# Altium PCB Driver.PcbDoc
Units mm, origin at the board's own origin, x right, y up, seen from the top; angles counter-clockwise.
Board outline 96 x 96 mm, 2 copper layers (Top Layer, Bottom Layer); 70 components, 57 nets, 224 pads, 32 vias.
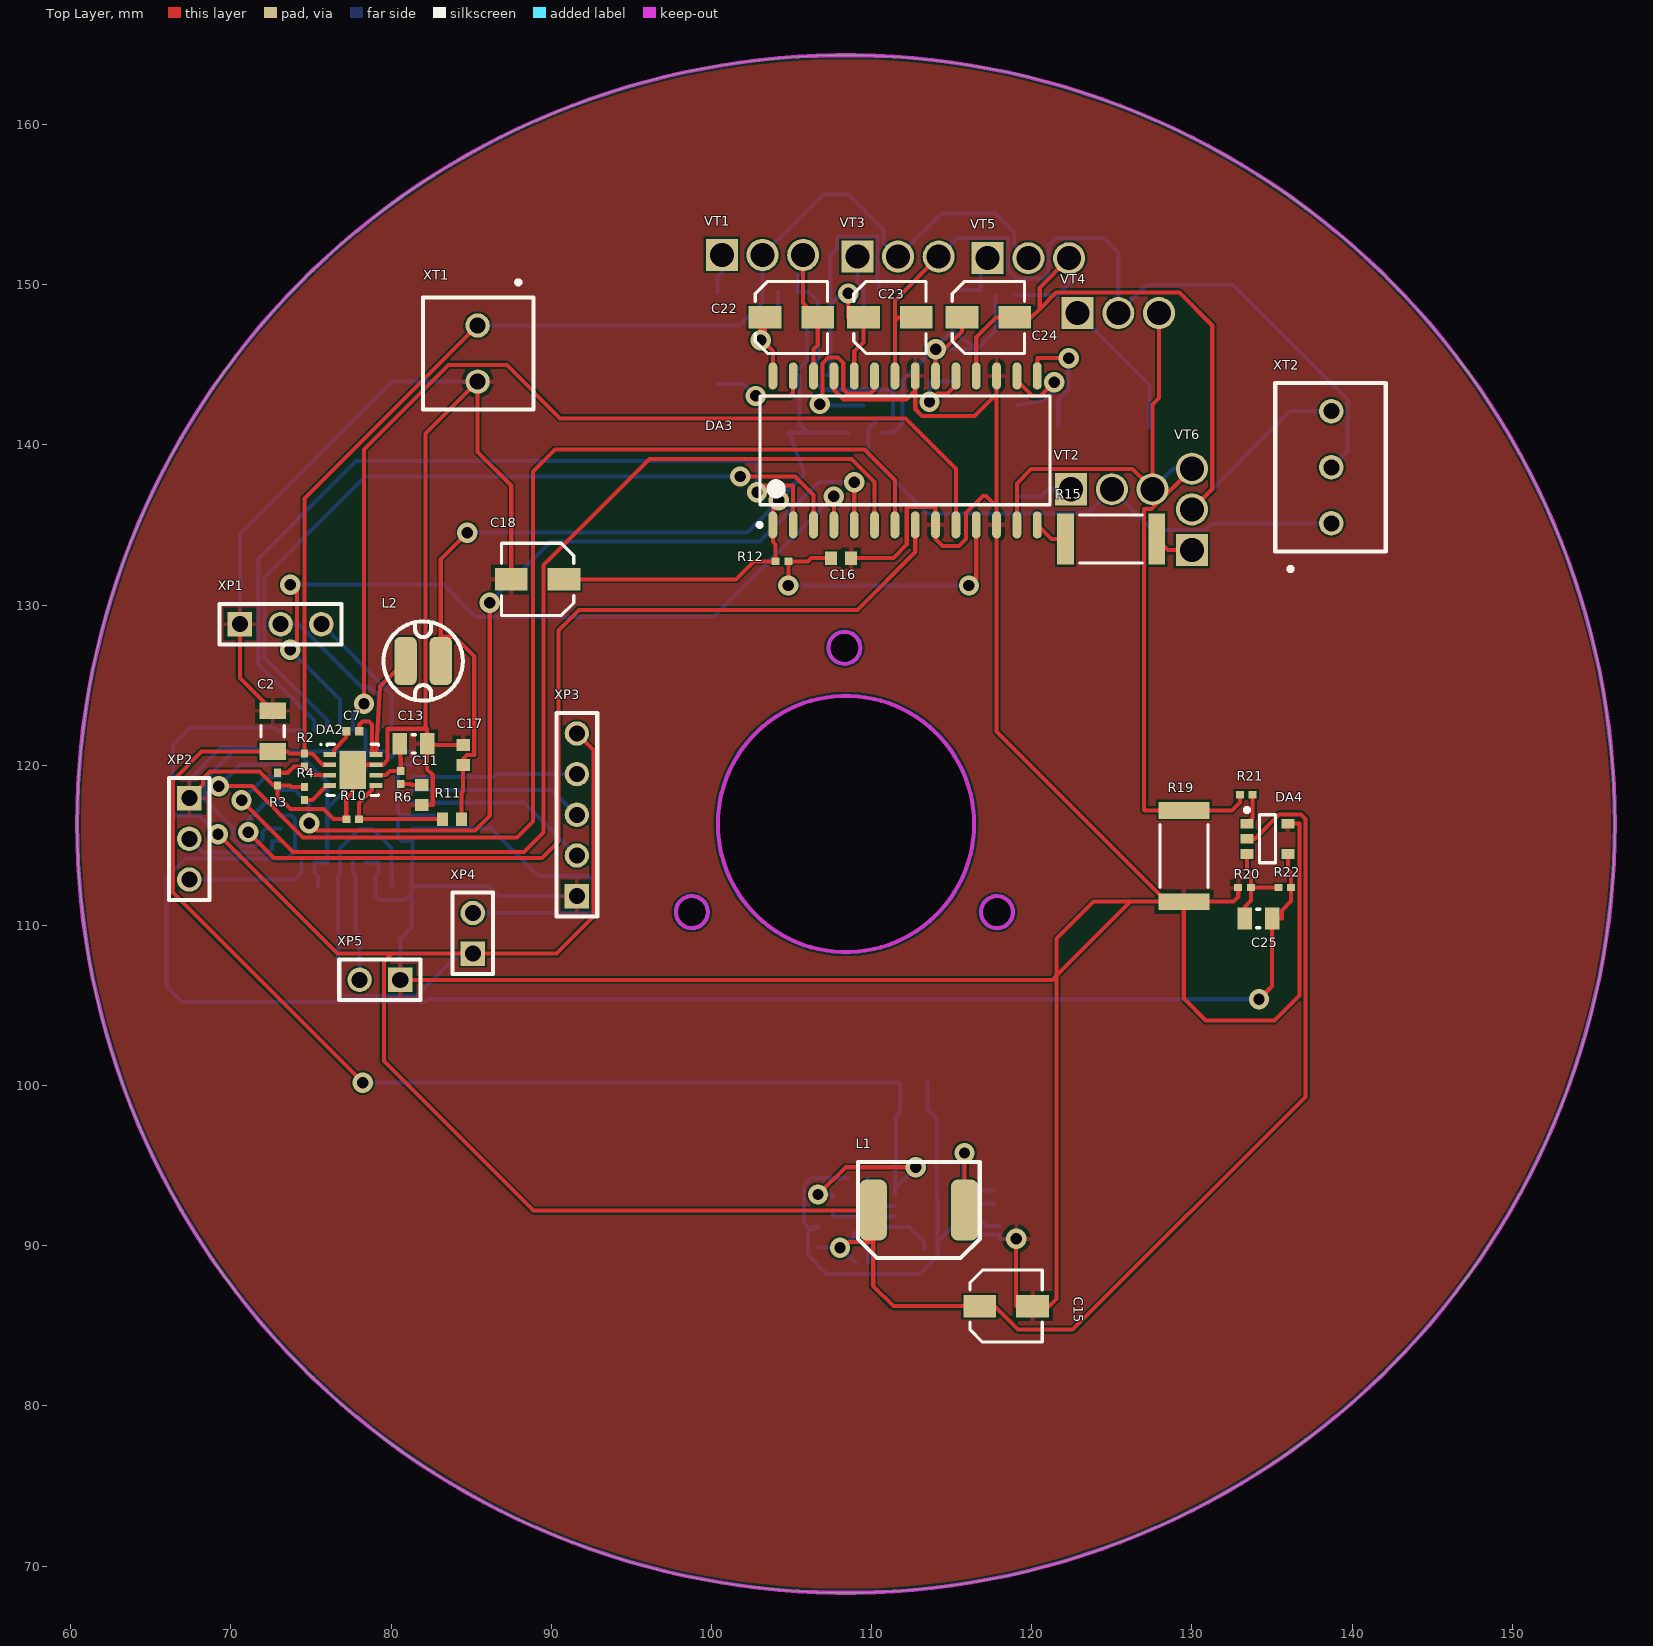
[diagram p0: Top Layer view]
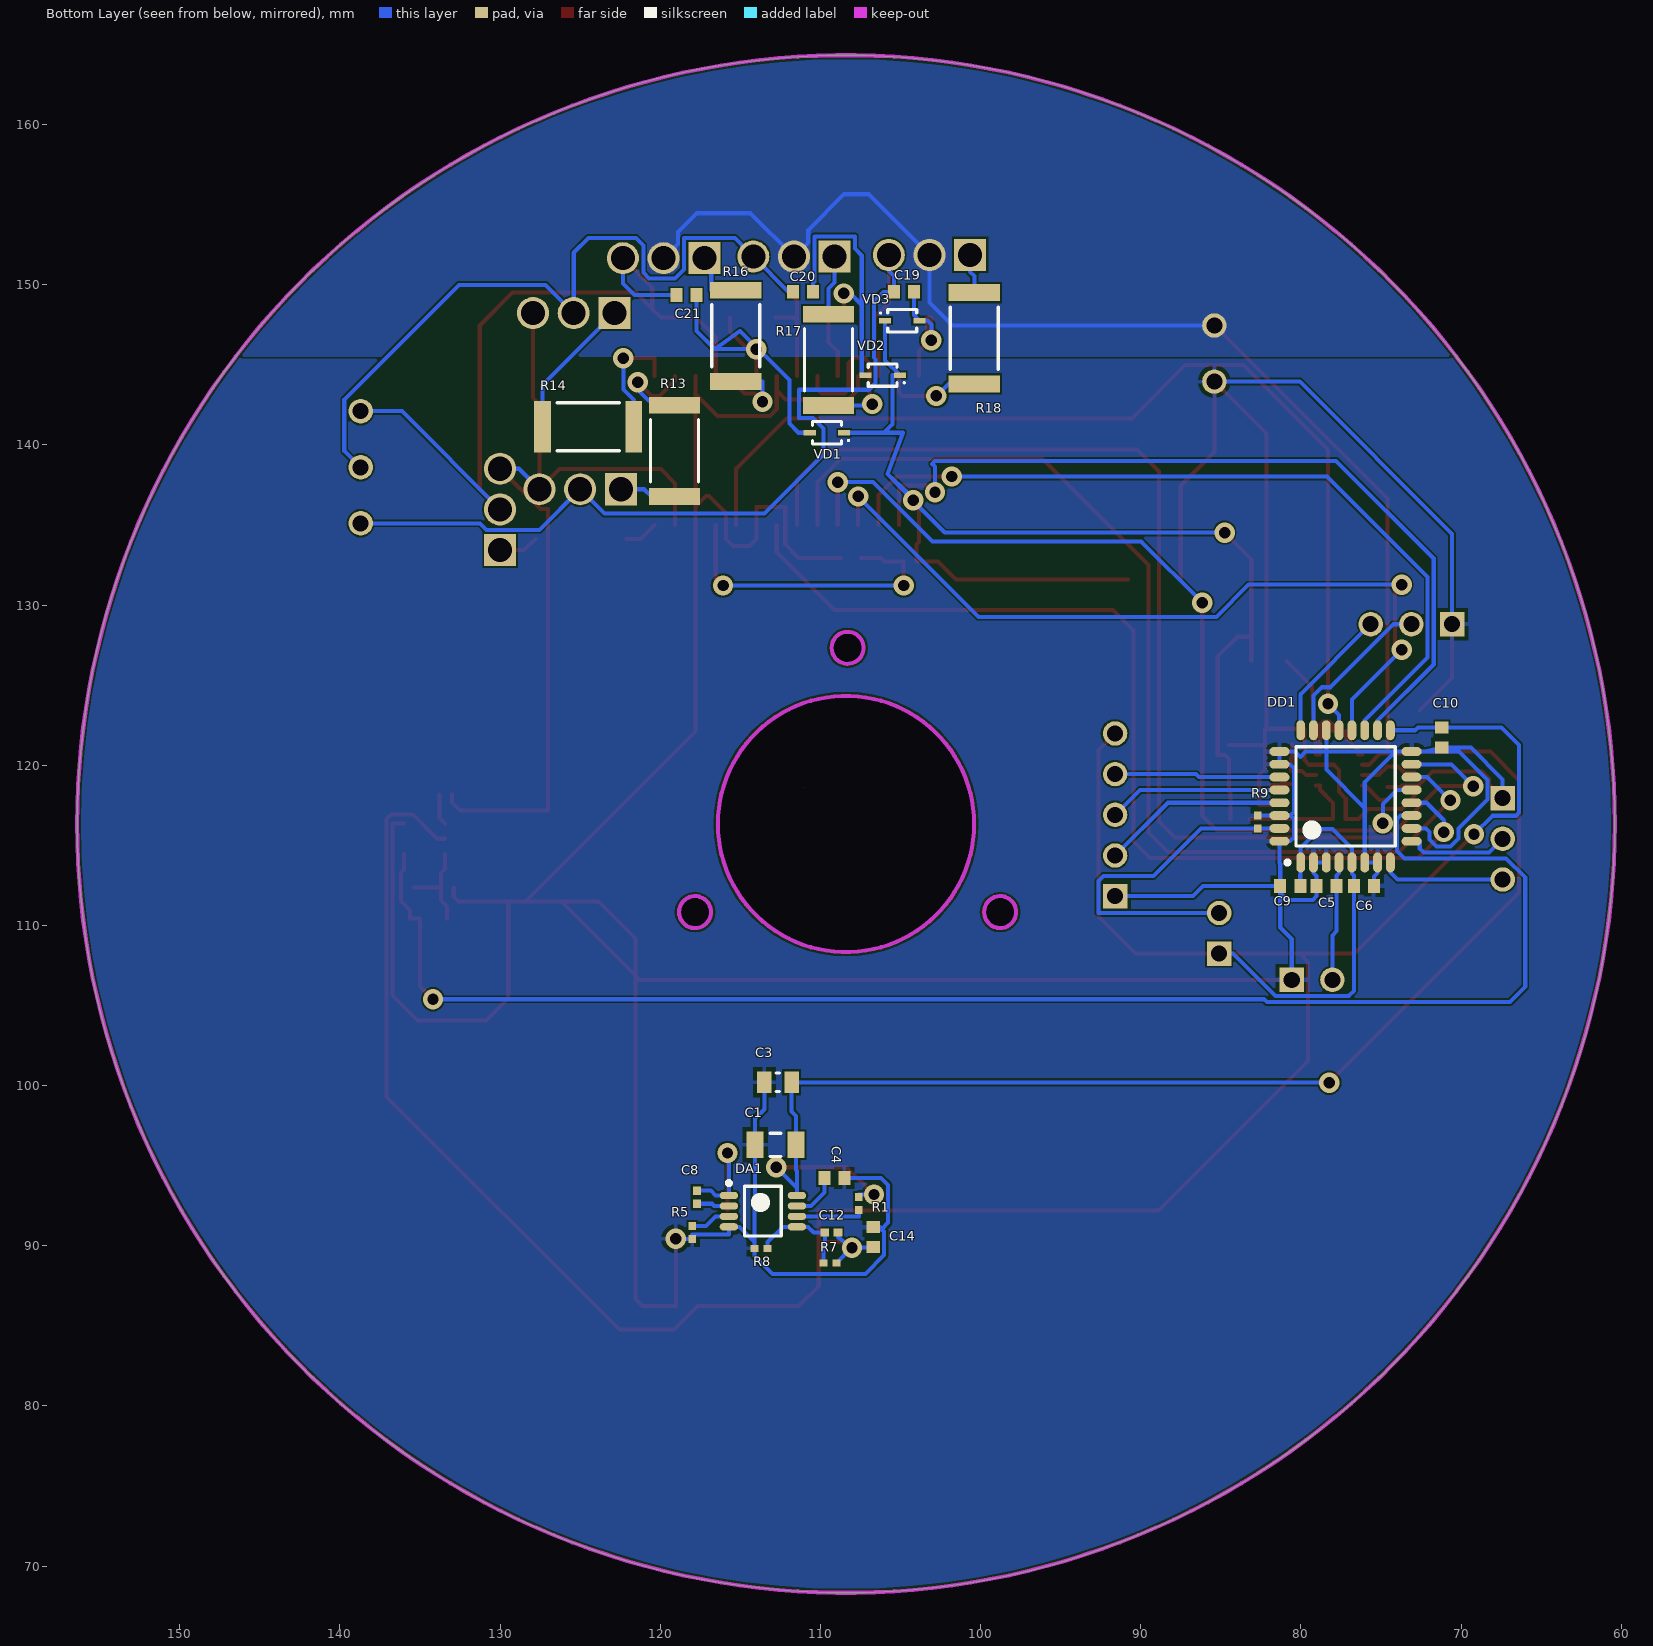
[diagram p1: Bottom Layer view, seen from below]
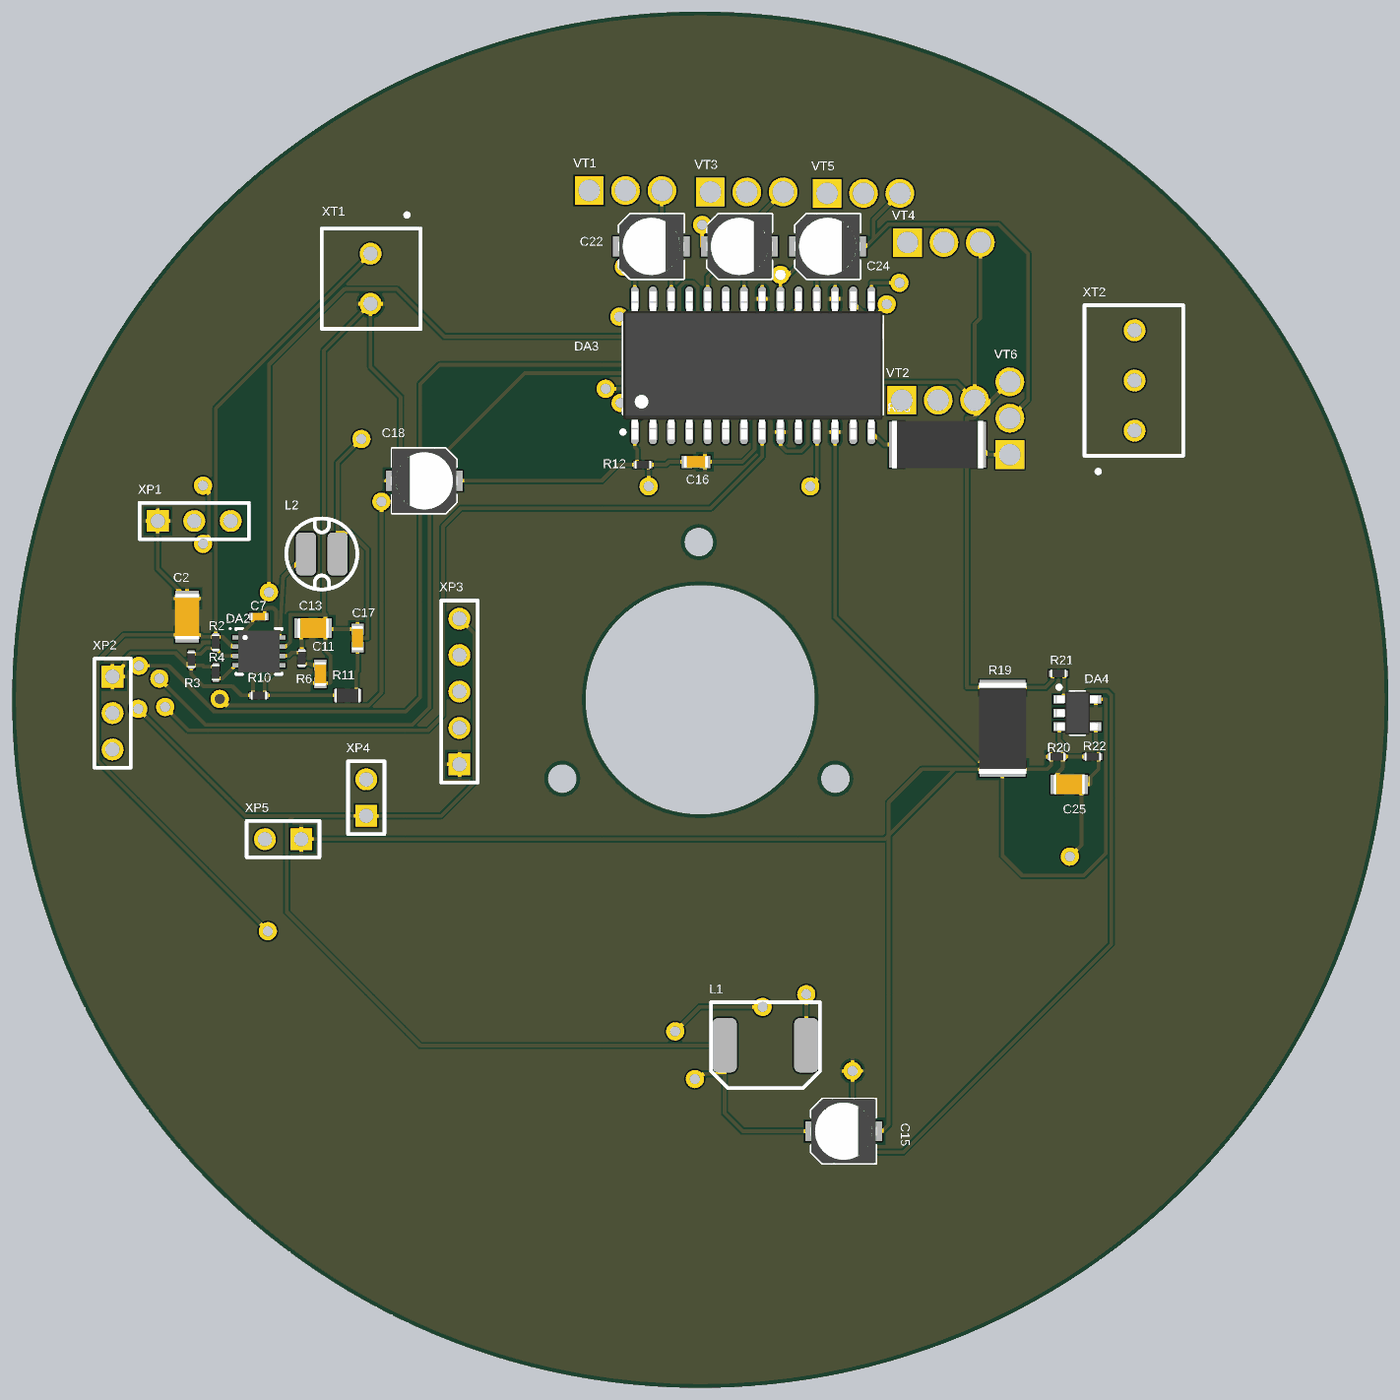
[diagram p2: 3D render of the assembled board from above, using the file's embedded part models]
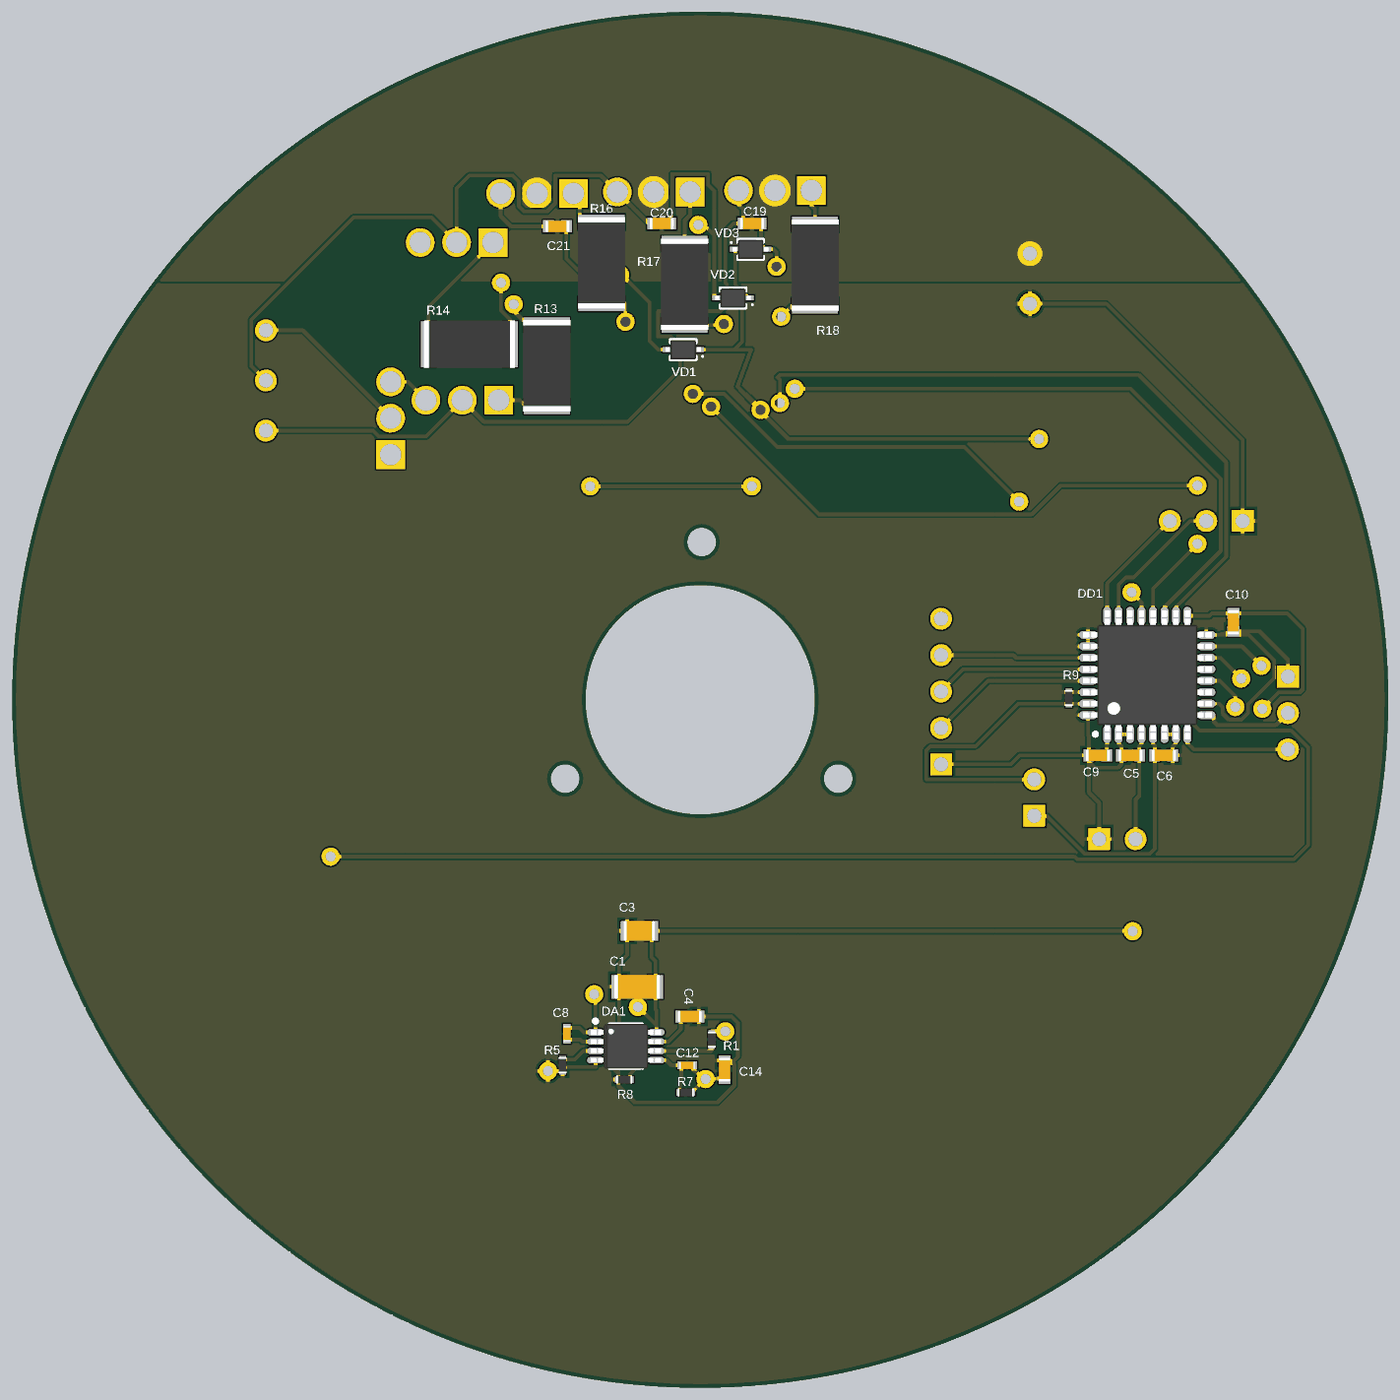
[diagram p3: 3D render of the assembled board from below, using the file's embedded part models]

## Layer stack, top to bottom
Top Solder: solder mask 0.0102, Solder Resist, Dk 3.5
Top Layer: signal copper 0.0356
Dielectric 1: dielectric 0.32, FR-4, Dk 4.8
Bottom Layer: signal copper 0.0356
Bottom Solder: solder mask 0.0102, Solder Resist, Dk 3.5

## Board outline
108.4,68.327 cw(c108.4,116.327) 60.4,116.327 cw(c108.4,116.327) 108.4,164.327 cw(c108.4,116.327) 156.4,116.327 cw(c108.4,116.327)
cut-out: 111,118.627
cut-out: 108.4,108.327 cw(c108.4,116.327) 100.4,116.327 cw(c108.4,116.327) 108.4,124.327 cw(c108.4,116.327) 116.4,116.327 cw(c108.4,116.327)
cut-out: 108.3,126.327 cw(c108.3,127.327) 107.3,127.327 cw(c108.3,127.327) 108.3,128.327 cw(c108.3,127.327) 109.3,127.327 cw(c108.3,127.327)
cut-out: 98.774,109.827 cw(c98.774,110.827) 97.774,110.827 cw(c98.774,110.827) 98.774,111.827 cw(c98.774,110.827) 99.774,110.827 cw(c98.774,110.827)
cut-out: 116.826,110.827 ccw(c117.826,110.827) 117.826,109.827 ccw(c117.826,110.827) 118.826,110.827 ccw(c117.826,110.827) 117.826,111.827 ccw(c117.826,110.827)

## Design rules (kind name [scope] priority, off if disabled: settings)
Clearance Clearance_1 [All] p1: gap=0.125 ignorepadtopadclearanceinfootprint=TRUE
Clearance [All] p2: gap=0.125 ignorepadtopadclearanceinfootprint=TRUE
PolygonConnect PolygonConnect_1 [InNet('+36V')] p1: connectstyle=Direct reliefconductorwidth=0.254 reliefentries=4 polygonreliefangle="90 Angle" airgapwidth=0.254
PolygonConnect [All] p2: connectstyle=Relief reliefconductorwidth=0.254 reliefentries=4 polygonreliefangle="90 Angle" airgapwidth=0.254
RoutingVias [All] p1: holewidth=0.711 width=1.27 viastyle="Through Hole" minholewidth=0.711 minwidth=1.27 maxholewidth=0.711 maxwidth=1.27
SolderMaskExpansion [All] p1: expansion=0.102
Width [All] p1: maxlimit=0.254 minlimit=0.254 preferedwidth=0.254
30 further rules are at their usual default settings.

## Components (designator, comment, footprint, x,y, rotation, side; value= is the part's Value field where it differs from the comment)
DA1 "DC-DC36-3.3" VSSOP8 113.588,92.154 r180 bottom
DA2 "TPS54061DRBR" VSON8 77.612,119.7 r0 top
DA3 "IR21365S" SOIC28 112.088,139.654 r90 top
DA4 "LMV321ILT" SOT23-5 134.713,115.404 r0 top
DD1 "STM32F030K6T6TR" LQFP32 77.213,118.054 r90 bottom
L1 "IND6X6" IND6X6 112.95,92.227 r180 top
L2 "IND3" IND3 82,126.5 r0 top
R1 "RES0402" RES0402 107.6,92.627 r270 bottom
R2 "RES0402" RES0402 74.6,120.327 r270 top
R3 "RES0402" RES0402 72.9,119.127 r270 top
R4 "RES0402" RES0402 74.6,118.227 r90 top
R5 "RES0402" RES0402 118,90.827 r270 bottom
R6 "RES0402" RES0402 80.6,119.227 r270 top
R7 "RES0402" RES0402 109.4,88.927 r180 bottom
R8 "RES0402" RES0402 113.7,89.827 r0 bottom
R9 "RES0402" RES0402 82.688,116.454 r90 bottom
R10 "RES0402" RES0402 77.6,116.627 r180 top
R11 "RES0603" RES0603 83.8,116.627 r180 top
R12 "RES0402" RES0402 104.4,132.727 r0 top
R13 "RES2512" RES2512 119.1,139.627 r270 bottom
R14 "RES2512" RES2512 124.5,141.127 r0 bottom
R15 "RES2512" RES2512 124.95,134.127 r0 top
R16 "RES2512" RES2512 115.288,146.804 r90 bottom
R17 "RES2512" RES2512 109.488,145.304 r90 bottom
R18 "RES2512" RES2512 100.388,146.654 r90 bottom
R19 "RES2512" RES2512 129.5,114.327 r270 top
R20 "RES0402" RES0402 133.288,112.354 r0 top
R21 "RES0402" RES0402 133.388,118.154 r0 top
R22 "RES0402" RES0402 135.788,112.354 r0 top
VD1 "DIODE" SOD323 109.588,140.754 r0 bottom
VD2 "DIODE" SOD323 106.113,144.354 r0 bottom
VD3 "DIODE" SOD323 104.888,147.754 r180 bottom
VT1 "IRFZ24NPBF" TO-220 103.188,151.854 r0 top
VT2 "IRFZ24NPBF" TO-220 125,137.227 r0 top
VT3 "IRFZ24NPBF" TO-220 111.648,151.754 r0 top
VT4 "IRFZ24NPBF" TO-220 125.4,148.227 r0 top
VT5 "IRFZ24NPBF" TO-220 119.788,151.654 r0 top
VT6 "IRFZ24NPBF" TO-220 130,135.967 r90 top
XP1 "SWDIO_CONNECTOR" PLC-3 73.1,128.8 r180 top
XP2 "UART_CONNECTOR" PLC-3 67.4,115.4 r90 top
XP3 "HALL_CONNECTOR" PLC-5 91.6,116.9 r270 top
XP4 "BOOT0_CONNECTOR" PLC-2 85.1,109.5 r270 top
XP5 "RESET_CONNECTOR" PLC-2 79.3,106.6 r0 top
XT1 "POWER_CONNECTOR" 350-2 85.4,145.7 r270 top
XT2 "PHASE_CONNECTOR" 350-3 138.7,138.6 r90 top
С1 "CAP1206" CAP1206 112.8,96.3 r0 bottom
С2 "CAP1206" CAP1206 72.6,122.127 r90 top
С3 "CAP0805" CAP0805 112.65,100.2 r0 bottom
С4 "CAP0603" CAP0603 109.125,94.227 r180 bottom
С5 "CAP0603" CAP0603 78.388,112.454 r180 bottom
С6 "CAP0603" CAP0603 76.063,112.454 r0 bottom
С7 "CAP0402" CAP0402 77.6,122.127 r0 top
С8 "CAP0402" CAP0402 117.7,93.027 r90 bottom
С9 "CAP0603" CAP0603 80.663,112.454 r0 bottom
С10 "CAP0603" CAP0603 71.2,121.727 r90 bottom
С11 "CAP0603" CAP0603 81.9,118.127 r270 top
С12 "CAP0402" CAP0402 109.31,90.827 r180 bottom
С13 "CAP0805" CAP0805 81.4,121.327 r0 top
С14 "CAP0603" CAP0603 106.7,90.527 r90 bottom
С15 "CAPD4" CAPD4 118.4,86.227 r0 top
С16 "CAP0603" CAP0603 108.1,132.927 r180 top
С17 "CAP0603" CAP0603 84.5,120.627 r90 top
С18 "CAPD4" CAPD4 89.15,131.6 r180 top
С19 "CAP0603" CAP0603 104.788,149.554 r0 bottom
С20 "CAP0603" CAP0603 111.088,149.554 r0 bottom
С21 "CAP0603" CAP0603 118.363,149.354 r0 bottom
С22 "CAPD4" CAPD4 104.988,147.954 r0 top
С23 "CAPD4" CAPD4 111.138,147.954 r0 top
С24 "CAPD4" CAPD4 117.288,147.954 r0 top
С25 "CAP0805" CAP0805 134.15,110.427 r0 top

## Footprints (in the part's own frame and the unit in brackets; to place one, negate y for a bottom-side part, rotate by r counter-clockwise, add the part's x,y. Pads: shape width x height; smd on the part's side, far side on the other; paste and mask are expansions set on the pad)
350-2 [mil]
  round 60 hole 39.37: 1(-68.9,0) 2(68.9,0)
  silkscreen extent -180,-134 138,138
350-3 [mil]
  round 60 hole 39.37: 1(-137.79,0) 2(0,0) 3(137.8,0)
  silkscreen extent -255,-134 207,138
CAP0402 [mm] "Chip Capacitor, 2-Leads, Body 1,00x0,50mm, IPC High Density"
  rect 0.54x0.52 smd: 1(-0.41,0) 2(0.41,0)
  body extent -0.55,-0.27 0.55,0.28, height 0.4
CAP0603 [mm] "Chip Capacitor, 2-Leads, Body 1,60x0,80mm, IPC High Density"
  rect 0.75x0.85 smd: 1(-0.625,0) 2(0.625,0)
  body extent -0.85,-0.41 0.85,0.4, height 0.9
CAP0805 [mm] "Chip Capacitor, 2-Leads, Body 2,10x1,30mm, IPC High Density"
  rect 0.9x1.35 smd: 1(-0.85,0) 2(0.85,0)
  silkscreen extent -0.1,-0.58 0.1,0.57, body extent -1.1,-0.7 1.1,0.7, height 0.55
CAP1206 [mm]
  rect 1.05x1.65 smd: 1(-1.275,0) 2(1.275,0)
  silkscreen extent -0.35,-0.73 0.35,0.72, body extent -1.6,-0.85 1.6,0.85, height 0.6
CAPD4 [mm] "Aluminum Electrolytic Capacitor, Body 4,30x4,30x6,10mm, IPC High Density"
  rect 2.05x1.4 smd: +(-1.65,0) -(1.65,0)
  silkscreen extent -2.25,-2.25 2.25,2.25, body extent -2.3,-2.25 2.3,2.25, height 6.1
IND3 [mm]
  rrect50% 1.4x3 smd: 1(-1.1,0) 2(1.1,0)
  silkscreen extent -2.47,-2.47 2.48,2.47
IND6X6 [mm]
  rrect50% 1.7x3.8 smd: 1(-2.85,0) 2(2.85,0)
  silkscreen extent -3.8,-3 3.8,3
LQFP32 [mm] "TQFP, 32-Leads, Body 7,00x7,00mm, Pitch 0,80mm, IPC High Density"
  oval 1.25x0.55 smd: 1(-4.125,2.8) 2(-4.125,2) 3(-4.125,1.2) 4(-4.125,0.4) 5(-4.125,-0.4) 6(-4.125,-1.2) 7(-4.125,-2) 8(-4.125,-2.8) 17(4.125,-2.8) 18(4.125,-2) 19(4.125,-1.2) 20(4.125,-0.4) 21(4.125,0.4) 22(4.125,1.2) 23(4.125,2) 24(4.125,2.8)
  oval 0.55x1.25 smd: 9(-2.8,-4.125) 10(-2,-4.125) 11(-1.2,-4.125) 12(-0.4,-4.125) 13(0.4,-4.125) 14(1.2,-4.125) 15(2,-4.125) 16(2.8,-4.125) 25(2.8,4.125) 26(2,4.125) 27(1.2,4.125) 28(0.4,4.125) 29(-0.4,4.125) 30(-1.2,4.125) 31(-2,4.125) 32(-2.8,4.125)
  silkscreen extent -4.25,-3.1 3.1,3.75, body extent -4.5,-4.5 4.5,4.5, height 1.6
PLC-2 [mil]
  round 60 hole 39.37: 1(-50,0)
  rect 60x60 hole 39.37: 2(50,0)
  silkscreen extent -100,-50 100,50
PLC-3 [mil]
  round 60 hole 39.37: 1(-100,0) 2(0,0)
  rect 60x60 hole 39.37: 3(100,0)
  silkscreen extent -150,-50 150,50
PLC-5 [mil]
  round 60 hole 39.37: 1(-200,0) 2(-100,0) 3(0,0) 4(100,0)
  rect 60x60 hole 39.37: 5(200,0)
  silkscreen extent -250,-50 250,50
RES0402 [mm]
  rect 0.5x0.45 smd: 1(-0.4,0) 2(0.4,0)
  body extent -0.55,-0.28 0.55,0.27, height 0.4
RES0603 [mm]
  rect 0.7x0.85 smd: 1(-0.6,0) 2(0.6,0)
  body extent -0.85,-0.48 0.85,0.48, height 0.5
RES2512 [mm]
  rect 1.05x3.2 smd: 1(-2.85,0) 2(2.85,0)
  silkscreen extent -1.95,-1.5 1.95,1.5, body extent -3.18,-1.65 3.18,1.65, height 0.6
SOD323 [mm]
  rect 0.75x0.35 smd: 1(-1.075,0) 2(1.075,0)
  silkscreen extent -1.4,-0.7 0.9,0.7, body extent -1.25,-0.67 1.25,0.68, height 1.1
SOIC28 [mm] "SOIC, 28-Leads, Body 17,90x7,50mm, Pitch 1,27mm, IPC High Density"
  oval 1.7x0.55 smd: 1(-4.65,8.255) 2(-4.65,6.985) 3(-4.65,5.715) 4(-4.65,4.445) 5(-4.65,3.175) 6(-4.65,1.905) 7(-4.65,0.635) 8(-4.65,-0.635) 9(-4.65,-1.905) 10(-4.65,-3.175) 11(-4.65,-4.445) 12(-4.65,-5.715) 13(-4.65,-6.985) 14(-4.65,-8.255) 15(4.65,-8.255) 16(4.65,-6.985) 17(4.65,-5.715) 18(4.65,-4.445) 19(4.65,-3.175) 20(4.65,-1.905) 21(4.65,-0.635) 22(4.65,0.635) 23(4.65,1.905) 24(4.65,3.175) 25(4.65,4.445) 26(4.65,5.715) 27(4.65,6.985) 28(4.65,8.255)
  silkscreen extent -4.77,-9.05 3.4,9.2, body extent -5.16,-9.05 5.16,9.05, height 2.65
SOT23-5 [mm] "SOT23, 5-Leads, Body 2,90x2,80mm, Pitch 0,95mm, IPC High Density"
  rect 0.8x0.6 smd: 1(-1.275,0.95) 2(-1.275,0) 3(-1.275,-0.95) 4(1.275,-0.95) 5(1.275,0.95)
  silkscreen extent -1.4,-1.5 0.5,1.92, body extent -1.6,-1.5 1.6,1.5, height 1.45
TO-220 [mm]
  round 2 hole 1.5: D(0,0) S(2.54,0)
  rect 2x2 hole 1.5: G(-2.54,0)
VSON8 [mm] "SON, 8-Leads, Body 3,00x3,00mm, Pitch 0,65mm, Thermal Pad 2,40x1,65mm, IPC High Density"
  rect 0.8x0.3 smd: 1(-1.445,0.975) 2(-1.445,0.325) 3(-1.445,-0.325) 4(-1.445,-0.975) 5(1.445,-0.975) 6(1.445,-0.325) 7(1.445,0.325) 8(1.445,0.975)
  rect 1.65x2.4 smd: 9(0,0)
  silkscreen extent -2.05,-1.6 1.6,1.65, body extent -1.45,-1.45 1.45,1.45, height 1
VSSOP8 [mm] "TSOP, 8-Leads, Body 3,00x3,00mm, Pitch 0,65mm, IPC High Density"
  oval 1.15x0.45 smd: 1(-2.125,0.975) 2(-2.125,0.325) 3(-2.125,-0.325) 4(-2.125,-0.975) 5(2.125,-0.975) 6(2.125,-0.325) 7(2.125,0.325) 8(2.125,0.975)
  silkscreen extent -2.25,-1.55 1.15,1.87, body extent -2.45,-1.55 2.45,1.55, height 1.1

## Part data
DA1: "LM5008MM/NOPB"
DA2: library part DC-DC36-12
DA3: library part DRIVER
DA4: library part OPAMP
DD1: library part MCU
R1 R4 R12: Resistance="97.6 к"
R2: Resistance="1.3 М"
R3 R9: Resistance="41.2 к"
R5: Resistance="107 к"
R6: Resistance="130 к"
R7 R10: Resistance="10 к"
R8: Resistance="31.6 к"
R11: Resistance="140 к"
R13 R14 R15 R16 R17 R18: Resistance=100
R19: Resistance=0.001
R20 R21: Resistance="1 к"
R22: Resistance="220 к"
VT1 VT2 VT3 VT4 VT5 VT6: library part MOSFET
С1 С2 С4 С22 С23 С24: Capacitance="1 мк"
С3 С5 С6 С7 С9 С10 С25: Capacitance="0.1 мк"
С8: Capacitance="0.01 мк"
С11: Capacitance=1800
С12: Capacitance=150
С13: Capacitance=56
С14 С15 С17 С18: Capacitance="10 мк"
С16 С19 С20 С21: Capacitance=2200

## Via types
v1: diameter 1.27, hole 0.711, Top Layer to Bottom Layer, 32 vias

## Nets (pads, with @x,y where several pads share a name; then routed paths per layer and width w, separated by ;. In a path a pad name is that pad's centre, name@x,y a point inside that pad or via, vN(x,y) a via of type N, cw(c..) or ccw(c..) an arc to the next point about the centre after c; other vN are vias at no path point)
+3.3V: DA4.2 DD1.1 DD1.5 DD1.17 L1.2 R7.2 XP3.1 XP4.2 С6.2 С9.1 С10.2 С12.2 С14.1 С15.+ | length 188.9
  Top Layer w0.254: v1(69.19,115.696) 76.657,108.23 80.061,108.23 ; XP3.1 92.634,120.946 92.634,110.541 90.323,108.23 XP4.2 80.061,108.23 ; v1(108.026,89.865) 108.497,90.221 110.1,90.221 ; L1.2 L1.2@110.1,92.202 ; DA4.2 133.921,115.404 135.433,116.916 136.804,116.916 137.084,116.637 137.084,99.289 122.555,84.76 119.145,84.76 117.678,86.227 С15.+ 111.354,86.227 110.1,87.481 110.1,90.221 ; 80.061,108.23 79.553,107.722 79.553,101.524 88.875,92.202 L1.2@110.1,92.202 ; 110.1,90.221 L1.2@110.1,92.202
  Bottom Layer w0.254: v1(69.19,115.696) 68.047,116.84 66.573,116.84 66.37,117.043 66.37,121.26 67.462,122.352 С10.2 72.695,122.352 72.868,122.179 DD1.17 ; С9.1 80.038,113.157 80.013,113.182 DD1.1 80.013,114.83 78.842,116.002 78.029,116.002 76.813,114.786 DD1.5 76.813,113.231 76.688,113.106 С6.2 76.688,105.911 77.013,105.586 81.585,105.586 84.229,108.23 XP4.2 ; С14.1 108.026,89.883 v1@108.044,89.883 ; v1(108.026,89.865) v1@108.044,89.883 ; С12.2 108.9,90.526 v1@108.044,89.883 ; R7.2 v1@108.044,89.883
+12V: DA3.1 L2.2 R11.1 R12.1 VD1.1 VD2.1 VD3.1 С17.1 С18.+ | length 79.4
  Top Layer w0.254: L2.2 83.1,128.016 ; R11.1 84.4,118.262 84.5,118.362 С17.1 84.5,120.39 84.734,120.625 85.192,120.625 85.192,126.797 83.972,128.016 83.1,128.016 ; v1(84.76,134.518) 83.1,132.859 83.1,128.016 ; С18.+ 101.526,131.6 102.653,132.727 R12.1 104,133.782 103.833,133.949 DA3.1 103.833,136.169 104.191,136.527 v1(104.191,136.55)
  Bottom Layer w0.254: v1(84.76,134.518) 102.235,134.518 104.038,136.322 104.226,136.517 105.81,138.17 ; v1(104.191,136.55) 104.038,136.55 104.121,136.626 105.81,138.17 ; VD3.1 105.963,145.279 VD2.1 105.49,144.354 105.49,141.287 106.023,140.754 ; VD1.1 106.023,140.754 ; 105.81,138.17 104.851,140.754 106.023,140.754
+36V: DA1.8 DA2.2 R1.1 R2.1 VT1.D VT3.D VT5.D XT1.1 С1.1 С2.1 С3.1 | length 160.7
  Top Layer w0.254: DA2.2 75.758,120.025 75.056,120.727 R2.1 ; v1(78.232,100.178) 66.37,112.039 66.37,119.05 68.172,120.852 С2.1 73.533,120.852 73.658,120.727 R2.1 ; XT1.1 74.6,136.65 R2.1 ; v1(106.655,93.193) 108.356,94.894 v1(112.751,94.894)
  Bottom Layer w0.254: v1(78.232,100.178) 78.254,100.2 С3.1 111.8,98.37 111.525,98.095 С1.1 111.525,94.728 111.463,94.666 111.463,93.607 ; XT1.1 101.743,147.45 103.188,148.895 VT1.D 106.981,155.647 108.511,155.647 110.756,153.402 110.756,152.646 VT3.D 114.351,154.457 117.741,154.457 118.896,153.302 118.896,152.546 VT5.D ; v1(106.655,93.193) 107.6,93.193 R1.1 ; DA1.8 111.463,93.607 ; v1(112.751,94.894) 111.463,93.607
ADC_IN5: DA4.4 DD1.11 R22.2 С25.2 | length 97.5
  Top Layer w0.254: v1(134.187,105.385) 135,106.197 С25.2@135,110.414 ; С25.2 С25.2@135,110.414 ; DA4.4 135.988,113.484 136.188,113.284 R22.2 136.188,111.506 135.611,110.929 135.611,110.414 С25.2@135,110.414
  Bottom Layer w0.254: DD1.11 73.773,116.854 73.99,116.637 73.99,114.63 73.534,114.174 67.184,114.174 65.989,112.979 65.989,106.172 66.954,105.207 82.118,105.207 82.296,105.385 v1(134.187,105.385)
BOOT0: DD1.31 R9.1 XP4.1 | length 22.2
  Bottom Layer w0.254: DD1.31 R9.1 86.233,116.054 89.206,113.081 92.329,113.081 92.634,112.776 92.634,110.77 XP4.1
ENABLE: DA3.10 DD1.21 | length 63.1
  Top Layer w0.254: v1(78.308,123.825) 78.308,139.7 83.591,144.983 87.224,144.983 90.549,141.658 112.111,141.658 115.263,138.506 DA3.10
  Bottom Layer w0.254: DD1.21 77.613,123.13 v1(78.308,123.825)
GND: DA1.4 DA2.7 DA2.9 DA3.9 DA3.12 DA3.17 DA3.21 DA3.25 DA4.5 DD1.2 DD1.3 DD1.6 DD1.7 DD1.10 DD1.16 DD1.22 DD1.25 DD1.26 DD1.30 DD1.32 R3.2 R4.2 R5.2 R8.2 R9.2 R10.2 R19.2 R20.1 XP1.3 XP2.3 XP3.5 XP5.2 XT1.2 С1.2 С2.2 С3.2 С4.2 С5.1 С6.1 С9.2 С10.1 С11.2 С13.2 С14.2 С15.- С16.1 С17.2 С18.- | length 397.6
  Top Layer w0.254: XP2.3 68.254,118.794 68.254,119.163 68.682,119.591 71.784,119.591 72.648,118.727 R3.2 ; XP1.3 70.56,125.442 С2.2 ; R4.2 73.785,118.627 73.685,118.727 R3.2 ; XP5.2 121.281,106.6 121.539,106.858 ; С11.2 82.601,117.502 82.601,119.38 82.25,119.731 С13.2@82.25,121.252 ; С17.2 С13.2@82.25,121.252 ; С18.- 87.5,137.453 85.4,139.553 XT1.2 82.144,140.694 82.144,122.276 ; DA3.25 107.643,143.436 108.256,142.823 112.166,142.823 112.723,143.38 ; С16.1 111.354,132.927 112.192,133.765 112.192,136.119 113.993,136.119 DA3.9 113.993,134.112 114.425,133.68 115.468,133.68 115.9,134.112 115.9,135.738 116.967,136.804 117.143,136.804 117.803,136.144 ; DA3.21 112.723,143.38 ; DA3.17 117.803,143.18 ; v1(119.024,90.427) 119.024,86.227 С15.- 121.107,86.227 121.539,86.659 121.539,106.858 ; R20.1 132.888,111.76 132.605,111.477 R19.2 R19.2@129.489,111.477 ; DA4.5 136.703,116.354 136.703,105.613 135.153,104.064 130.861,104.064 129.489,105.435 R19.2@129.489,111.477 ; R3.2 72.9,118.085 73.715,117.27 75.766,117.27 76.409,116.627 R10.2 77.2,117.932 77.612,118.344 DA2.9 77.937,120.025 DA2.7 79.487,120.025 79.783,120.322 79.783,122.276 82.144,122.276 ; 82.144,122.276 82.25,122.169 ; 82.144,122.276 82.25,122.276 82.25,122.169 ; С13.2@82.25,121.252 С13.2 82.25,122.169 ; 112.723,143.38 112.723,142.24 113.153,141.81 116.433,141.81 117.803,143.18 ; 117.803,136.144 DA3.12 117.803,122.096 R19.2@128.422,111.477 ; 117.803,136.144 117.803,143.18 ; 121.539,106.858 121.539,109.166 123.85,111.477 126.158,111.477 ; 121.539,106.858 126.158,111.477 ; 126.158,111.477 R19.2@128.422,111.477 ; R19.2@128.422,111.477 R19.2@129.489,111.477
  Bottom Layer w0.254: XP2.3 67.4,119.113 69.389,121.102 С10.1 72.257,120.854 ; XP1.3 70.56,134.441 80.069,143.95 XT1.2 ; DD1.10 72.186,116.054 71.956,115.824 71.956,115.362 71.526,114.932 70.655,114.932 70.17,115.418 70.17,116.04 68.353,117.856 68.353,119.075 70.132,120.854 72.257,120.854 ; С6.1 75.438,113.055 75.213,113.28 DD1.7 DD1.6 76.013,117.336 ; DD1.3 DD1.2 79.213,113.281 79.013,113.081 С5.1 79.013,111.825 79.248,111.59 80.874,111.59 81.288,112.005 ; DD1.22 78.413,120.854 ; XP5.2 80.57,109.144 81.288,109.862 81.288,112.005 ; R9.2 DD1.30 80.67,116.854 ; XP3.5 86.74,111.82 86.106,112.454 С9.2 ; С4.2 106.218,94.227 105.768,93.777 105.768,91.44 106.165,91.043 ; С3.2 113.5,98.517 114.075,97.942 С1.2 114.075,93.065 114.1,93.04 114.1,90.221 ; DA1.4 DA1.4@115.697,91.179 ; v1(119.024,90.427) R5.2 118,90.703 115.697,90.703 DA1.4@115.697,91.179 ; 72.257,120.854 DD1.16 74.041,120.854 ; 74.041,120.854 74.423,120.523 76.013,118.933 76.013,117.336 ; 74.041,120.854 78.413,120.854 ; 76.013,117.336 78.413,119.736 78.413,120.854 ; 78.413,120.854 79.703,120.854 80.035,120.523 80.366,120.854 DD1.25 DD1.26 80.67,120.054 80.442,119.825 80.442,117.083 80.67,116.854 ; 80.67,116.854 80.659,116.854 80.442,116.637 80.442,115.483 80.67,115.254 DD1.32 81.338,113.867 81.288,113.817 С9.2 ; 81.288,112.005 С9.2 ; 106.02,90.898 106.02,89.408 107.188,88.24 112.979,88.24 114.1,89.36 R8.2 114.1,90.221 ; 106.02,90.898 С14.2 106.274,91.152 106.165,91.043 ; 106.02,90.898 106.165,91.043 ; 114.1,90.221 115.058,91.179 DA1.4@115.697,91.179
HALL1: DD1.27 XP3.2 | length 10.3
  Bottom Layer w0.254: DD1.27 86.36,119.254 86.546,119.44 XP3.2
HALL2: DD1.28 XP3.3 | length 10.9
  Bottom Layer w0.254: DD1.28 90.046,118.454 XP3.3
HALL3: DD1.29 XP3.4 | length 11.6
  Bottom Layer w0.254: DD1.29 88.306,117.654 XP3.4
NetDA1_1: DA1.1 L1.1 С8.2 | length 8.4
  Top Layer w0.254: L1.1 v1(115.8,95.783)
  Bottom Layer w0.254: v1(115.8,95.783) 115.713,95.696 DA1.1 116.535,93.129 116.843,93.437 С8.2
NetDA1_2: DA1.2 С8.1 | length 2
  Bottom Layer w0.254: DA1.2 116.637,92.479 116.775,92.617 С8.1
NetDA1_3: DA1.3 R5.1 | length 2.5
  Bottom Layer w0.254: DA1.3 116.535,91.829 117.137,91.227 R5.1
NetDA1_5: DA1.5 R7.1 R8.1 С12.1 | length 6.4
  Bottom Layer w0.254: R7.1 109.8,89.814 109.72,89.894 С12.1 110.414,90.827 110.766,91.179 DA1.5 112.342,91.179 113.3,90.221 R8.1
NetDA1_6: DA1.6 R1.2 | length 4.3
  Bottom Layer w0.254: R1.2 107.6,91.829 DA1.6
NetDA1_7: DA1.7 С4.1 | length 3
  Bottom Layer w0.254: С4.1 109.75,93.321 110.592,92.479 DA1.7
NetDA2_1: DA2.1 С7.1 | length 2
  Top Layer w0.254: DA2.1 76.429,120.675 76.429,120.955 77.19,121.717 С7.1
NetDA2_3: DA2.3 R2.2 R3.1 | length 3.7
  Top Layer w0.254: R3.1 73.533,119.527 73.933,119.927 R2.2 74.6,119.914 75.139,119.375 DA2.3
NetDA2_4: DA2.4 R4.1 | length 1.9
  Top Layer w0.254: R4.1 75.082,117.827 75.98,118.725 DA2.4
NetDA2_5: DA2.5 R10.1 R11.2 | length 7.9
  Top Layer w0.254: DA2.5 78.816,118.725 78.816,118.466 78,117.649 R10.1 80.594,116.627 R11.2
NetDA2_6: DA2.6 R6.1 С13.1 | length 3.4
  Top Layer w0.254: DA2.6 79.68,119.375 79.932,119.627 R6.1 80.6,120.447 80.55,120.497 С13.1
NetDA2_8: DA2.8 L2.1 С7.2 | length 10
  Top Layer w0.254: С7.2 78.01,122.53 78.213,122.733 78.613,122.733 78.816,122.53 78.816,120.675 DA2.8 79.299,124.899 L2.1
NetDA3_11: DA3.11 R12.2 С16.2 | length 19.5
  Top Layer w0.254: v1(104.8,131.216) R12.2 106.02,132.727 106.22,132.927 С16.2 ; v1(116.076,131.216) 116.533,131.674 DA3.11
  Bottom Layer w0.254: v1(104.8,131.216) v1(116.076,131.216)
NetDA3_13: DA3.13 R19.1 R21.1 VT2.S VT4.S VT6.S | length 55.6
  Top Layer w0.254: DA3.13 119.073,137.592 119.962,138.481 126.286,138.481 VT2.S 127.54,142.519 127.94,142.919 VT4.S ; VT6.S 127.485,135.992 127,135.992 127,117.202 127.025,117.177 R19.1 132.486,117.177 132.988,117.679 R21.1
  Bottom Layer w0.254: VT2.S 128.82,138.507 VT6.S
NetDA3_14: DA3.14 R15.1 | length 2.1
  Top Layer w0.254: DA3.14 121.22,134.127 R15.1
NetDA3_15: DA3.15 R14.1 | length 7.6
  Top Layer w0.254: DA3.15 120.343,145.415 v1(122.301,145.415)
  Bottom Layer w0.254: R14.1 121.65,142.808 122.301,143.459 v1(122.301,145.415)
NetDA3_16: DA3.16 R13.1 | length 6.5
  Top Layer w0.254: DA3.16 119.073,144.02 120.04,143.053 120.548,143.053 v1(121.412,143.916)
  Bottom Layer w0.254: R13.1 120.727,142.774 121.412,143.459 v1(121.412,143.916)
NetDA3_18: DA3.18 VT5.S VT6.D XT2.3 С21.2 С24.- | length 51.6
  Top Layer w0.254: DA3.18 116.533,146.734 117.753,147.954 С24.- 119.963,147.954 120.498,148.488 ; VT5.S 120.498,149.824 120.498,148.488 ; VT6.D 131.267,137.234 131.267,147.447 129.21,149.504 121.514,149.504 120.498,148.488
  Bottom Layer w0.254: С21.2 121.615,149.354 122.328,150.067 VT5.S ; VT6.D 136.133,142.1 XT2.3
NetDA3_19: DA3.19 R16.1 | length 5.6
  Top Layer w0.254: v1(113.614,142.697) 114.119,143.202 114.726,143.202 115.263,143.739 DA3.19
  Bottom Layer w0.254: v1(113.614,142.697) 113.614,143.954 R16.1
NetDA3_20: DA3.20 VD1.2 С21.1 С24.+ | length 21.9
  Top Layer w0.254: DA3.20 v1@113.993,145.415 ; v1(113.993,145.974) v1@113.993,145.415 ; С24.+ 115.646,147.954 115.646,147.068 v1@113.993,145.415
  Bottom Layer w0.254: VD1.2 111.354,140.754 111.938,141.338 111.938,144.043 115.011,147.117 116.595,145.974 ; v1(113.993,145.974) 116.595,145.974 ; С21.1 117.738,147.117 116.595,145.974
NetDA3_22: DA3.22 VT3.S VT4.D XT2.2 С20.2 С23.- | length 56.1
  Top Layer w0.254: DA3.22 111.453,147.726 ; С23.- 111.681,147.954 111.453,147.726 ; VT3.S 111.453,149.019 111.453,147.726
  Bottom Layer w0.254: С20.2 111.988,149.554 VT3.S 115.342,152.908 118.516,152.908 118.516,150.952 119.075,150.393 120.701,150.393 121.056,150.749 121.056,152.451 121.514,152.908 124.486,152.908 125.4,151.994 VT4.D 127.16,149.987 132.563,149.987 139.725,142.824 139.725,139.625 XT2.2
NetDA3_23: DA3.23 R17.1 | length 11.6
  Top Layer w0.254: v1(106.756,142.545) 106.934,142.723 106.934,145.085 107.29,145.44 107.899,145.44 108.229,145.11 108.229,143.459 108.487,143.202 109.931,143.202 110.183,143.454 DA3.23
  Bottom Layer w0.254: v1(106.756,142.545) 106.847,142.454 R17.1
NetDA3_24: DA3.24 VD2.2 С20.1 С23.+ | length 22.8
  Top Layer w0.254: v1(108.534,149.454) 108.534,147.954 С23.+ 109.488,146.396 108.913,145.821 DA3.24
  Bottom Layer w0.254: VD2.2 107.417,144.354 107.417,148.742 ; v1(108.534,149.454) 108.128,149.454 107.417,148.742 ; С20.1 110.463,150.09 110.363,150.19 110.363,153.01 107.848,153.01 107.848,152.248 107.417,151.816 107.417,148.742
NetDA3_26: DA3.26 VT1.S VT2.D XT2.1 С19.2 С22.- | length 59.5
  Top Layer w0.254: VT1.S 105.728,148.864 С22.- 106.638,146.239 106.373,145.974 DA3.26
  Bottom Layer w0.254: VT1.S 105.728,150.861 105.413,150.546 С19.2 106.07,149.554 106.655,148.97 106.655,145.44 106.553,145.339 106.553,143.866 106.979,143.44 111.34,143.44 111.34,141.677 110.46,141.677 109.804,141.021 109.804,139.395 113.487,135.712 123.485,135.712 VT2.D 127.531,134.696 130.835,134.696 131.239,135.1 XT2.1
NetDA3_27: DA3.27 R18.1 | length 6.2
  Top Layer w0.254: v1(102.758,143.053) 104.9,143.053 105.103,143.256 DA3.27
  Bottom Layer w0.254: R18.1 102.006,143.804 v1(102.758,143.053)
NetDA3_28: DA3.28 VD3.2 С19.1 С22.+ | length 9.3
  Top Layer w0.254: v1(103.073,146.533) 103.073,147.954 С22.+ 103.338,146.367 103.833,145.872 DA3.28
  Bottom Layer w0.254: v1(103.073,146.533) 103.073,147.523 103.304,147.754 VD3.2 104.163,148.104 С19.1
NetDA4_1: DA4.1 R21.2 | length 1.9
  Top Layer w0.254: DA4.1 133.788,116.704 R21.2
NetDA4_3: DA4.3 R20.2 R22.1 С25.1 | length 6
  Top Layer w0.254: С25.1 133.3,111.176 133.688,111.564 R20.2 ; DA4.3 133.438,113.509 133.688,113.259 R20.2 ; R22.1 R20.2
NetR6_2: R6.2 С11.1 | length 1.3
  Top Layer w0.254: R6.2 81.204,118.827 81.279,118.752 С11.1
NetR13_2: R13.2 VT2.G | length 3.5
  Bottom Layer w0.254: R13.2 120.548,136.777 120.998,137.227 VT2.G
NetR14_2: R14.2 VT4.G | length 9
  Bottom Layer w0.254: VT4.G 127.35,143.737 R14.2
NetR15_2: R15.2 VT6.G | length 2.5
  Top Layer w0.254: R15.2 128.5,133.427 VT6.G
NetR16_2: R16.2 VT5.G | length 4
  Bottom Layer w0.254: R16.2 116.815,149.654 116.815,151.654 VT5.G
NetR17_2: R17.2 VT3.G | length 3.8
  Bottom Layer w0.254: VT3.G 109.108,150.138 109.488,149.758 R17.2
NetR18_2: R18.2 VT1.G | length 2.5
  Bottom Layer w0.254: R18.2 100.388,150.546 100.648,150.806 VT1.G
NRST: DD1.4 XP5.1 С5.2 | length 7.5
  Bottom Layer w0.254: DD1.4 77.613,113.256 77.763,113.106 С5.2 77.763,109.639 78.03,109.372 XP5.1
SYS_SWCLK: DD1.24 XP1.1 | length 8.4
  Bottom Layer w0.254: XP1.1 80.013,124.427 DD1.24
SYS_SWDIO: DD1.23 XP1.2 | length 10.1
  Bottom Layer w0.254: XP1.2 74.205,128.8 78.139,124.866 78.689,124.866 79.213,124.343 DD1.23
TIM1_BKIN: DA3.8 DD1.12 | length 62.9
  Top Layer w0.254: v1(71.069,115.824) 72.695,114.198 89.408,114.198 90.449,115.24 90.449,128.422 91.719,129.692 109.116,129.692 112.723,133.299 DA3.8
  Bottom Layer w0.254: v1(71.069,115.824) 71.069,116.561 72.163,117.654 DD1.12
TIM1_CH1: DA3.2 DD1.18 | length 52.8
  Top Layer w0.254: v1(102.845,137.031) 103.266,137.452 105.08,137.452 105.103,137.43 DA3.2
  Bottom Layer w0.254: DD1.18 75.213,122.78 71.704,126.289 71.704,132.893 77.8,138.989 102.845,138.989 103.022,138.811 102.845,138.633 v1(102.845,137.031)
TIM1_CH1N: DA3.5 DD1.13 | length 57
  Top Layer w0.254: v1(74.879,116.383) 75.336,115.926 85.242,115.926 86.157,116.84 v1(86.157,130.15) ; DA3.5 108.913,137.666 v1(108.915,137.668)
  Bottom Layer w0.254: DD1.13 74.002,118.454 74.879,117.577 v1(74.879,116.383) ; v1(86.157,130.15) 89.967,133.96 102.997,133.96 106.705,137.668 v1(108.915,137.668)
TIM1_CH2: DA3.3 DD1.19 | length 50.4
  Top Layer w0.254: v1(101.803,138.024) 105.229,138.024 106.373,136.88 DA3.3
  Bottom Layer w0.254: DD1.19 76.013,122.793 72.085,126.721 72.085,131.75 78.359,138.024 v1(101.803,138.024)
TIM1_CH2N: DA3.6 DD1.14 | length 67.1
  Top Layer w0.254: v1(70.663,117.805) 73.882,114.586 88.297,114.586 89.51,115.799 89.51,132.486 96.133,139.11 108.741,139.11 110.183,137.668 DA3.6
  Bottom Layer w0.254: v1(70.663,117.805) 72.112,119.254 DD1.14
TIM1_CH3: DA3.4 DD1.20 | length 50.4
  Top Layer w0.254: v1(73.711,127.203) 74.117,127.61 74.117,130.861 v1(73.711,131.267) ; DA3.4 107.643,136.777 v1(107.645,136.779)
  Bottom Layer w0.254: v1(73.711,127.203) 76.813,124.101 DD1.20 ; v1(73.711,131.267) 83.265,131.267 85.27,129.263 100.129,129.263 v1(107.645,136.779)
TIM1_CH3N: DA3.7 DD1.15 | length 74.4
  Top Layer w0.254: v1(69.24,118.694) 71.307,118.694 74.507,115.494 87.859,115.494 88.849,116.484 88.849,138.328 90.221,139.7 109.55,139.7 111.453,137.797 DA3.7
  Bottom Layer w0.254: v1(69.24,118.694) 70.6,120.054 DD1.15
USART1_RX: DD1.9 XP2.2 | length 6.6
  Bottom Layer w0.254: XP2.2 68.247,114.553 72.323,114.553 72.579,114.809 72.579,115.254 DD1.9
USART1_TX: DD1.8 XP2.1 | length 7.8
  Bottom Layer w0.254: XP2.1 73.971,112.86 74.413,113.302 DD1.8

## Polygon pours and split planes (outlines as drawn)
+36V on Bottom Layer "Top Layer-No Net" (solid, remove dead copper, pour order 16): 67,145.7 67.2,145.5 148.9,145.5 107.8,186.6
GND on Bottom Layer "Top Layer-No Net" (solid, remove dead copper, pour order 18): 42.8,171.7 45.9,168.6 188,168.6 188,63.6 182.4,58 179.9,60.5 47.2,60.5
GND on Top Layer "Top Layer-No Net" (solid, remove dead copper, pour order 20): 51.9,170 179,170 190.1,158.9 190.1,54.3 37.4,54.3 36.3,55.4

## Keep-outs
Keep-Out Layer:
  circle w0.254: c108.4,116.327 r48
  circle w0.254: c108.4,116.327 r8
  circle w0.254: c108.3,127.327 r1
  circle w0.254: c98.774,110.827 r1
  circle w0.254: c117.826,110.827 r1